# Altium PCB DATMACH.PcbDoc
Units mil, origin at the board's own origin, x right, y up, seen from the top; angles counter-clockwise.
Board outline 2830 x 3865 mil, 2 copper layers (Top Layer, Bottom Layer); 86 components, 58 nets, 272 pads, 0 vias.
Unrouted connection lines stored in the file: 11.
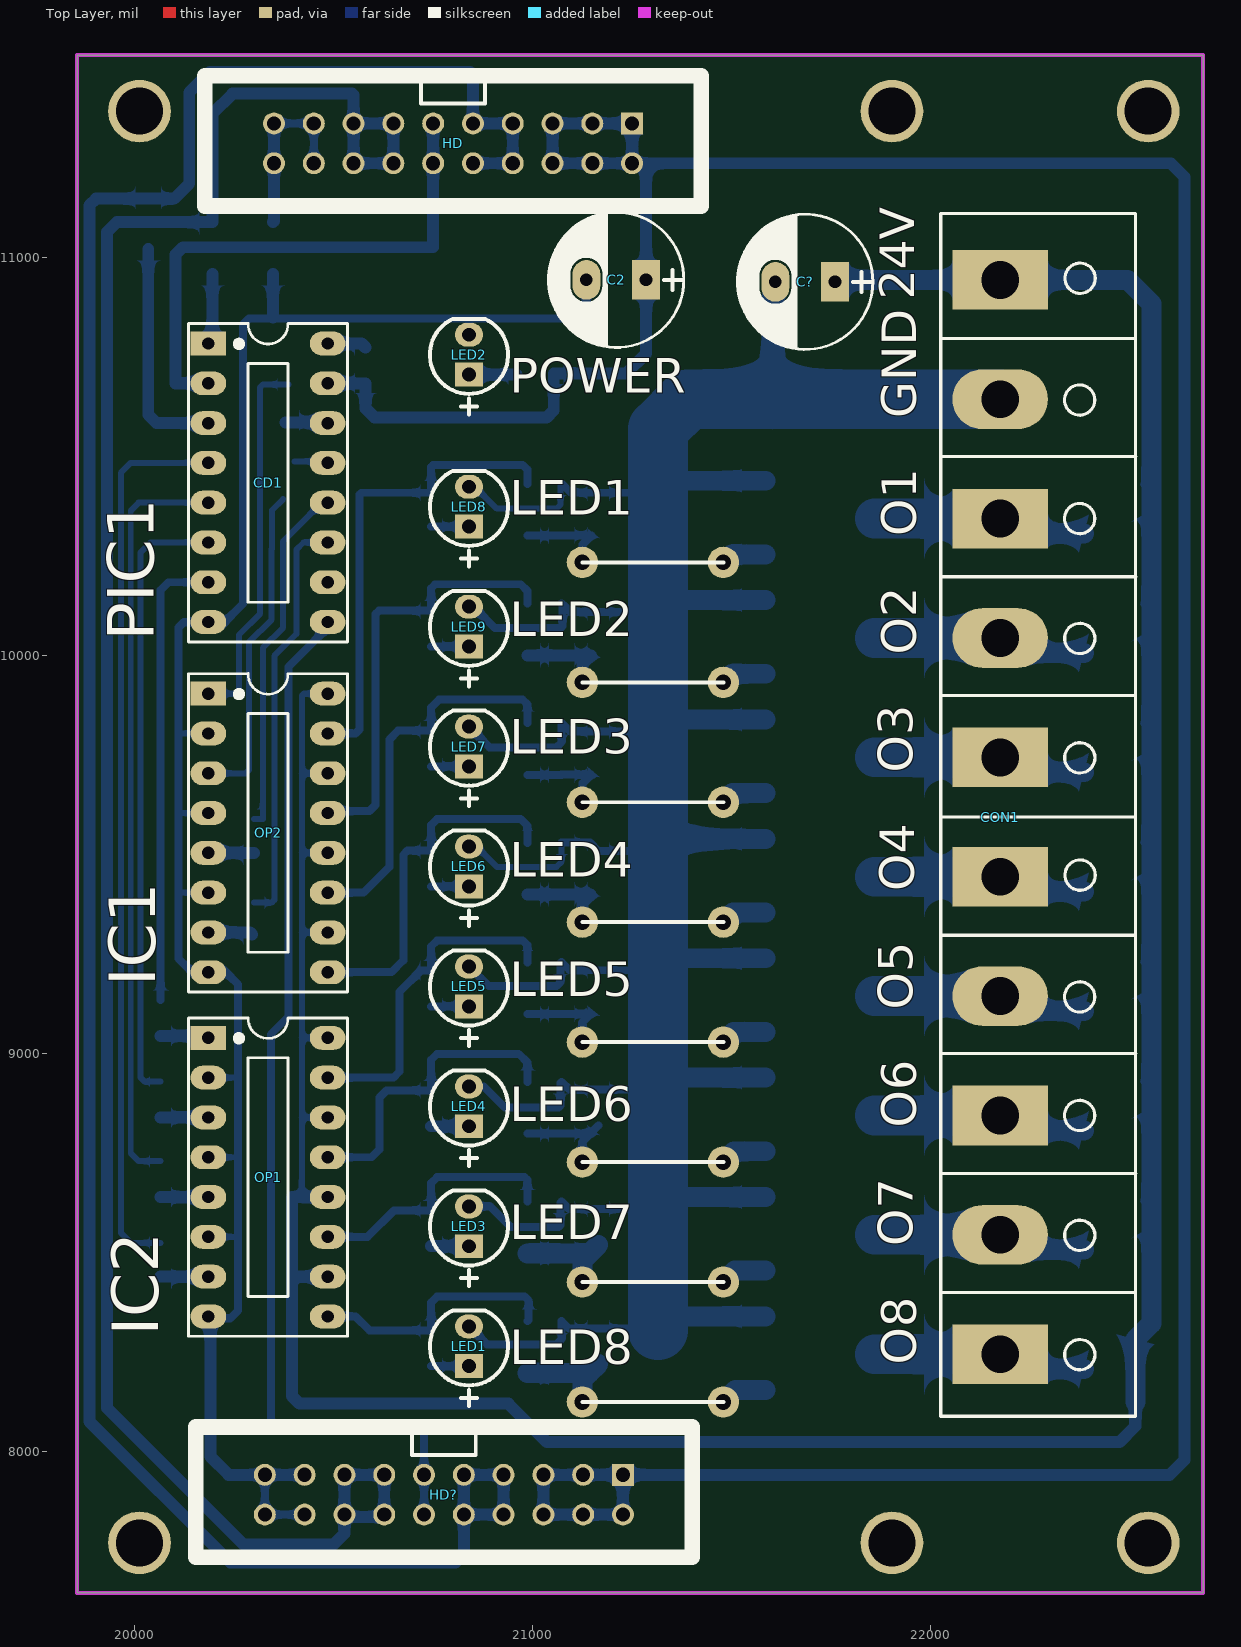
[diagram p0: Top Layer view]
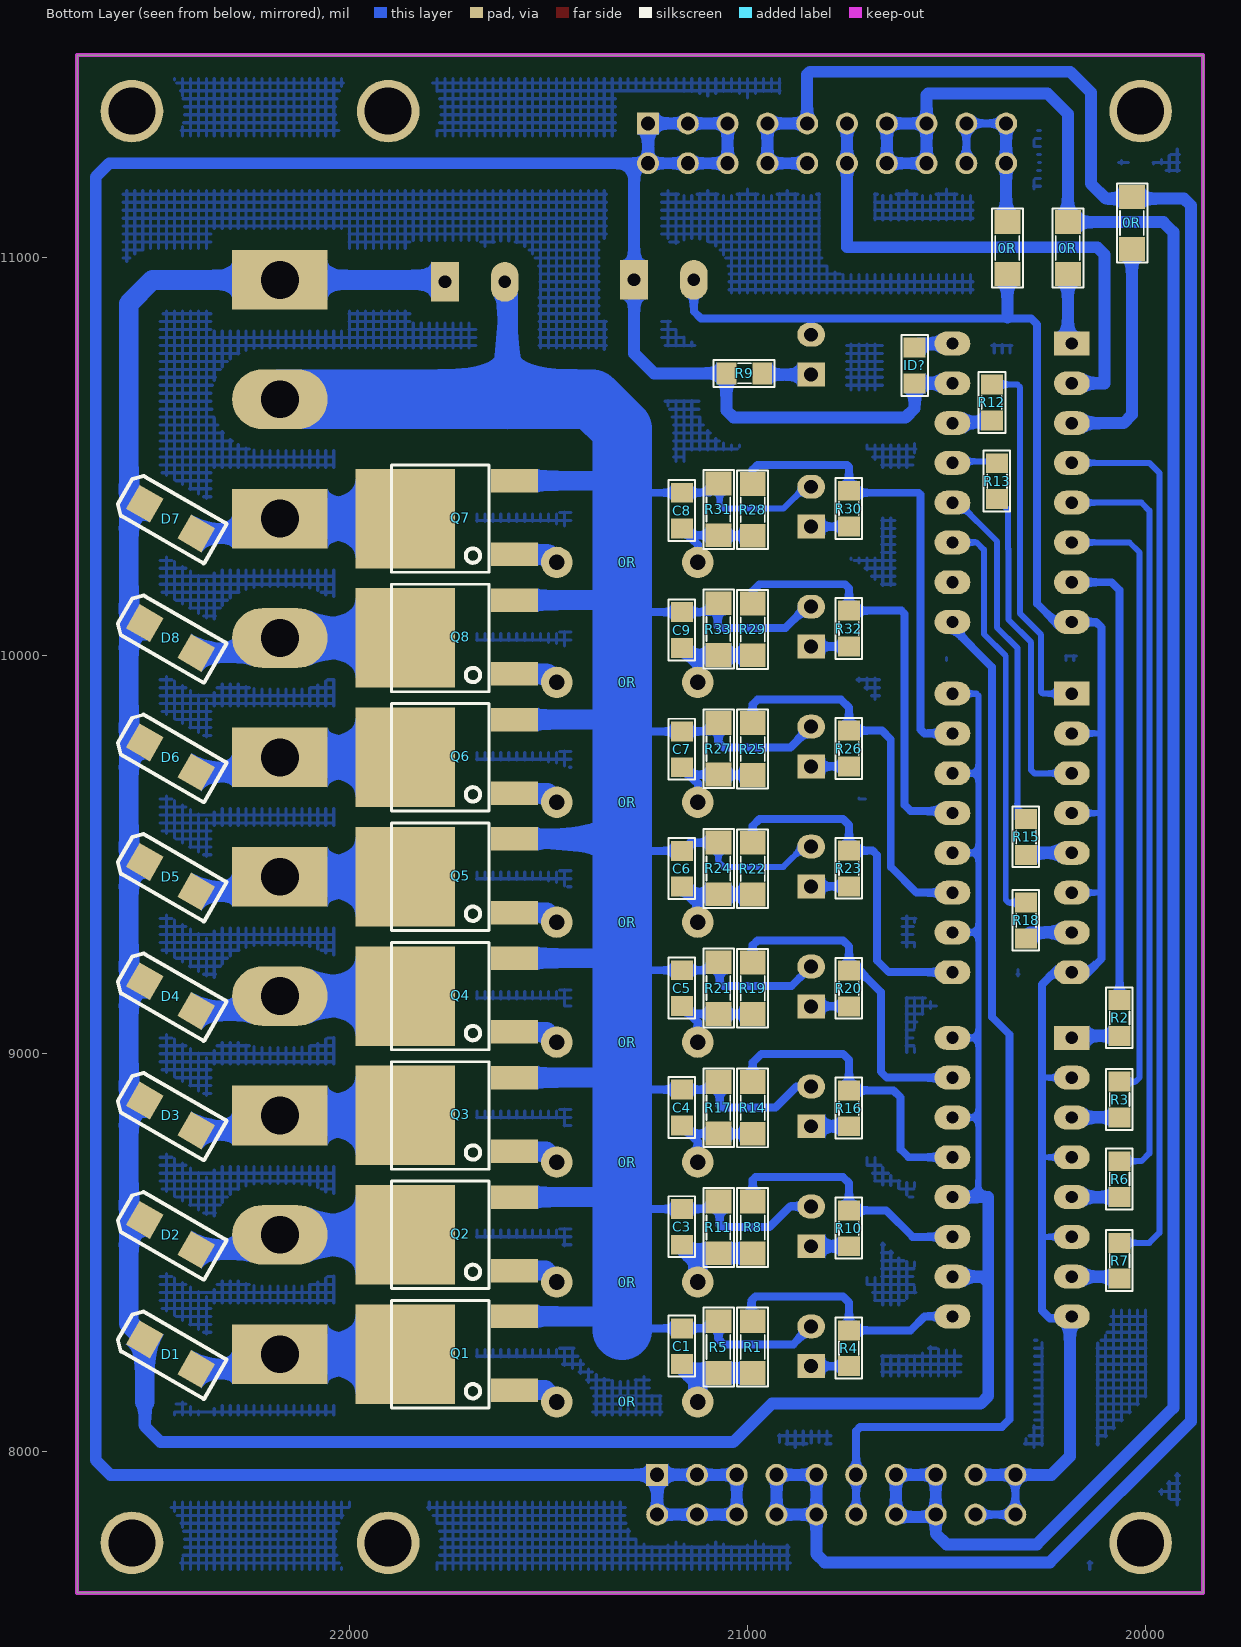
[diagram p1: Bottom Layer view, seen from below]
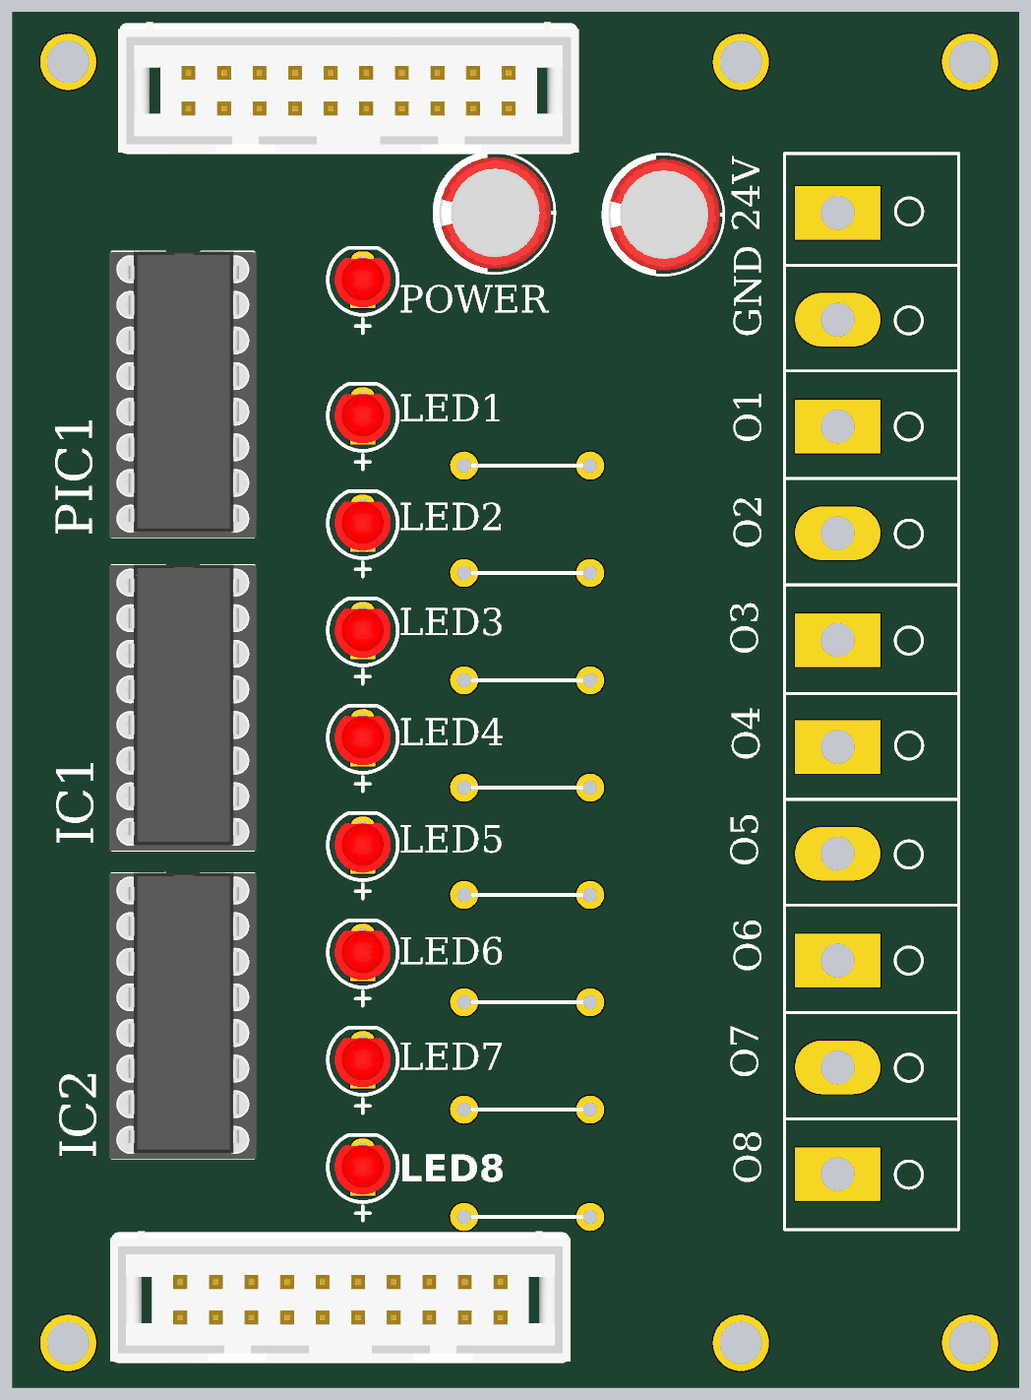
[diagram p2: 3D render of the assembled board from above, using the file's embedded part models]
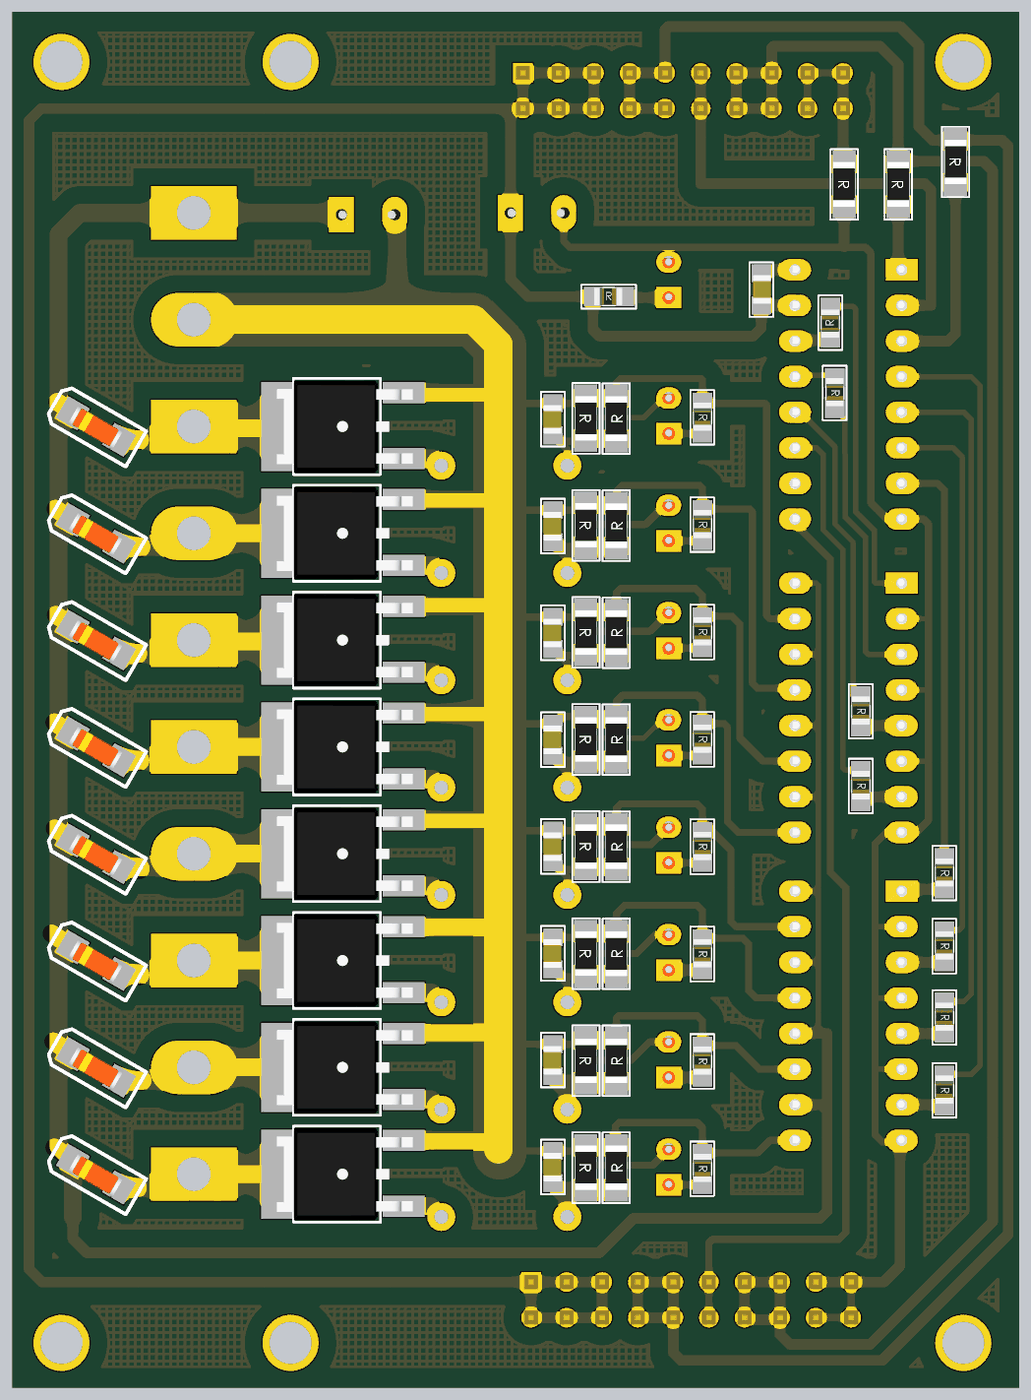
[diagram p3: 3D render of the assembled board from below, using the file's embedded part models]

## Layer stack, top to bottom
Top Solder: solder mask 0.4, Solder Resist, Dk 3.5
Top Layer: signal copper 1.4
Dielectric 1: dielectric 12.6, FR-4, Dk 4.8
Bottom Layer: signal copper 1.4
Bottom Solder: solder mask 0.4, Solder Resist, Dk 3.5

## Board outline
19855,7645 19855,11510 22685,11510 22685,7645

## Design rules (kind name [scope] priority, off if disabled: settings)
Clearance [All] p1: gap=10 except(50: Arc-Poly Track-Poly SMDPad-Poly THPad-Poly Via-Poly Fill-Poly Poly-Poly)
PolygonConnect [All] p1: connectstyle=Relief reliefconductorwidth=10 reliefentries=4 polygonreliefangle="90 Angle" airgapwidth=10
RoomDefinition CongSuat_SCH [InComponentClass('CongSuat_SCH')] p1: confinementstyle=ConfineIn formatcopy=TRUE lockcomponents=FALSE outline 3805,1580 24060,1580 24060,4625 3805,4625
RoutingVias [All] p1: holewidth=28 width=50 viastyle="Through Hole" minholewidth=28 minwidth=50 maxholewidth=28 maxwidth=50
SolderMaskExpansion [All] p1: expansion=4
Width [All] p1: maxlimit=150 minlimit=10 preferedwidth=10
30 further rules are at their usual default settings.

## Classes and differential pairs
component class CongSuat_SCH: C1 C2 C3 C4 C5 C6 C7 C8 C9 C? CD1 CON1 D1 D2 D3 D4 D5 D6 D7 D8 HD HD? ID? LED1 LED2 LED3 LED4 LED5 LED6 LED7 LED8 LED9 OP1 OP2 Q1 Q2 Q3 Q4 Q5 Q6 Q7 Q8 R1 R2 R3 R4 R5 R6 R7 R8 R9 R10 R11 R12 R13 R14 R15 R16 R17 R18 R19 R20 R21 R22 R23 R24 R25 R26 R27 R28 R29 R30 R31 R32 R33

## Components (designator, comment, footprint, x,y, rotation, side; value= is the part's Value field where it differs from the comment)
0R "Comment" GIM 21125,10235 r0 bottom
0R "Comment" GIM 21125,9933.57 r0 bottom
0R "Comment" GIM 21125,9632.14 r0 bottom
0R "Comment" GIM 21125,9330.71 r0 bottom
0R "Comment" GIM 21125,9029.29 r0 bottom
0R "Comment" GIM 21125,8727.86 r0 bottom
0R "Comment" GIM 21125,8426.43 r0 bottom
0R "Comment" GIM 21125,8125 r0 bottom
0R "Comment" TRO_SMD_1206 20344,11027 r270 bottom
0R "Comment" TRO_SMD_1206 20192,11027 r270 bottom
0R "Comment" TRO_SMD_1206 20031,11090 r270 bottom
C1 "104" TU_SMD_0805 21165,8265 r270 bottom
C2 "680_uF" "TU_HOA(100uF/35V - 470uF/16V)" 21210,10945 r180 top
C3 "104" TU_SMD_0805 21165,8565 r270 bottom
C4 "104" TU_SMD_0805 21165,8865 r270 bottom
C5 "104" TU_SMD_0805 21165,9165 r270 bottom
C6 "104" TU_SMD_0805 21165,9465 r270 bottom
C7 "104" TU_SMD_0805 21165,9765 r270 bottom
C8 "104" TU_SMD_0805 21165,10365 r270 bottom
C9 "104" TU_SMD_0805 21165,10065 r270 bottom
C? "100uF/16V" "TU_HOA(100uF/35V - 470uF/16V)" 21685,10940 r180 top
CD1 "PIC" DIP16 20335,10435 r270 top
CON1 "CON 10 KF762_MH" "CON 10 KF762" 22175,9595 r90 top locked
D1 "SS34" SOD80 22450,8245 r210 bottom
D2 "SS34" SOD80 22450,8545 r210 bottom
D3 "SS34" SOD80 22450,8845 r210 bottom
D4 "SS34" SOD80 22450,9145 r210 bottom
D5 "SS34" SOD80 22450,9445 r210 bottom
D6 "SS34" SOD80 22450,9745 r210 bottom
D7 "SS34" SOD80 22450,10345 r210 bottom
D8 "SS34" SOD80 22450,10045 r210 bottom
HD "IDE 20" "CABLE 20" 21250,11338 r180 top
HD? "IDE 20" "CABLE 20" 21227.01,7942 r180 top
ID? "Inductor 0805_MH" TU_SMD_0805 20580,10730 r90 bottom
LED1 "LED3" "LED 3mm Do" 20840,8265 r90 top
LED2 "LED3" "LED 3mm Do" 20840,10757 r90 top
LED3 "LED3" "LED 3mm Do" 20840,8566.43 r90 top
LED4 "LED3" "LED 3mm Do" 20840,8867.86 r90 top
LED5 "LED3" "LED 3mm Do" 20840,9169.29 r90 top
LED6 "LED3" "LED 3mm Do" 20840,9470.71 r90 top
LED7 "LED3" "LED 3mm Do" 20840,9772.14 r90 top
LED8 "LED3" "LED 3mm Do" 20840,10375 r90 top
LED9 "LED3" "LED 3mm Do" 20840,10073.57 r90 top
OP1 "IC2" DIP16 20335,8690 r270 top
OP2 "IC1" DIP16 20335,9555 r270 top
Q1 "FDD 8870" TO-252 21645,8115 r90 bottom
Q2 "FET" TO-252 21645,8415 r90 bottom
Q3 "FDD 8870" TO-252 21645,8715 r90 bottom
Q4 "FET" TO-252 21645,9015 r90 bottom
Q5 "FED" TO-252 21645,9315 r90 bottom
Q6 "FET" TO-252 21645,9615 r90 bottom
Q7 "FET" TO-252 21645,10215 r90 bottom
Q8 "FET" TO-252 21645,9915 r90 bottom
R1 "10K" TRO_SMD_1206 20990,8261 r90 bottom
R2 "330" "Tro SMD 0805" 20065,9090 r270 bottom
R3 "330" "Tro SMD 0805" 20065,8885 r270 bottom
R4 "4K7" "Tro SMD 0805" 20745,8260 r270 bottom
R5 "10K" TRO_SMD_1206 21070,8265 r270 bottom
R6 "330" "Tro SMD 0805" 20065,8685 r270 bottom
R7 "330" "Tro SMD 0805" 20065,8480 r270 bottom
R8 "10K" TRO_SMD_1206 20990,8561.57 r90 bottom
R9 "1K" "Tro SMD 0805" 21008,10710 r180 bottom
R10 "4K7" "Tro SMD 0805" 20745,8561.43 r270 bottom
R11 "10K" TRO_SMD_1206 21070,8565.71 r270 bottom
R12 "330" "Tro SMD 0805" 20386,10637 r90 bottom
R13 "330" "Tro SMD 0805" 20373,10439 r270 bottom
R14 "10K" TRO_SMD_1206 20990,8862.14 r90 bottom
R15 "330" "Tro SMD 0805" 20300,9545 r270 bottom
R16 "4K7" "Tro SMD 0805" 20745,8862.86 r270 bottom
R17 "10K" TRO_SMD_1206 21070,8866.43 r270 bottom
R18 "330" "Tro SMD 0805" 20300,9335 r270 bottom
R19 "10K" TRO_SMD_1206 20990,9162.71 r90 bottom
R20 "4K7" "Tro SMD 0805" 20745,9164.29 r270 bottom
R21 "10K" TRO_SMD_1206 21070,9167.14 r270 bottom
R22 "10K" TRO_SMD_1206 20990,9463.29 r90 bottom
R23 "4K7" "Tro SMD 0805" 20745,9465.71 r270 bottom
R24 "10K" TRO_SMD_1206 21070,9467.86 r270 bottom
R25 "10K" TRO_SMD_1206 20990,9763.86 r90 bottom
R26 "4K7" "Tro SMD 0805" 20745,9767.14 r270 bottom
R27 "10K" TRO_SMD_1206 21070,9768.57 r270 bottom
R28 "10K" TRO_SMD_1206 20990,10365 r90 bottom
R29 "10K" TRO_SMD_1206 20990,10064.43 r90 bottom
R30 "4K7" "Tro SMD 0805" 20745,10370 r270 bottom
R31 "10K" TRO_SMD_1206 21070,10370 r270 bottom
R32 "4K7" "Tro SMD 0805" 20745,10068.57 r270 bottom
R33 "10K" TRO_SMD_1206 21070,10069.29 r270 bottom

## Footprints (in the part's own frame and the unit in brackets; to place one, negate y for a bottom-side part, rotate by r counter-clockwise, add the part's x,y. Pads: shape width x height; smd on the part's side, far side on the other; paste and mask are expansions set on the pad)
"CABLE 20" [mm] "Connector; Header; 5x2 Position"
  rect 1.4x1.4 hole 0.9: 1(0,0)
  round 1.4 hole 0.9: 2(0,2.54) 3(2.54,0) 4(2.54,2.54) 5(5.08,0) 6(5.08,2.54) 7(7.62,0) 8(7.62,2.54) 9(10.16,0) 10(10.16,2.54) 11(12.7,0) 12(12.7,2.54) 13(15.24,0) 14(15.24,2.54) 15(17.78,0) 16(17.78,2.54) 17(20.32,0) 18(20.32,2.54) 19(22.86,0) 20(22.86,2.54)
  silkscreen extent -4.42,-3.05 27.28,5.27, body extent -5.02,-3.63 27.88,5.77, height 9.3
"CON 10 KF762" [mil]
  rect 150x240 hole 95: 1(-1350,0) 3(-750,0) 5(-150,0) 6(150,0) 8(750,0) 10(1350,0)
  oval 150x240 hole 95: 2(-1050,0) 4(-450,0) 7(450,0) 9(1050,0)
  silkscreen extent -1506,-341 1517,149
DIP16 [mil] "16 PIN, W 300mil, Pin to pin 100mil"
  rect 60x90 hole 31: 1(-350,-150)
  oval 60x90 hole 31: 2(-250,-150) 3(-150,-150) 4(-50,-150) 5(50,-150) 6(150,-150) 7(250,-150) 8(350,-150) 9(350,150) 10(250,150) 11(150,150) 12(50,150) 13(-50,150) 14(-150,150) 15(-250,150) 16(-350,150)
  silkscreen extent -400,-200 400,200, body extent -402,-207 402,206, height 299
GIM [mm]
  round 2 hole 1: 1(0,0) 1(9,0)
"LED 3mm Do" [mil] "Footprintf LED phi 3"
  rect 60x70 hole 35: 1(-50,0)
  oval 60x70 hole 35: 2(50,0)
  silkscreen extent -150,-98 90,98, body extent -78,-79 60,79, height 205
SOD80 [mil]
  rect 70x70 smd: 1(74.8,0) 2(-74.8,0)
  silkscreen extent -133,-56 129,59, body extent -73,-34 73,29, height 63
TO-252 [mil] "TO-252"
  rect 59.06x118.11 smd: 1(40,-60) 3(225,-60)
  rect 250x250 smd: 2(130,215)
  silkscreen extent -5,5 265,250, body extent 0,-85 260,296, height 91
"Tro SMD 0805" [mil]
  rect 50x55 smd: 1(-45,0) 2(45,0)
  silkscreen extent -77,-34 76,33, body extent -62,-28 56,27, height 21
TRO_SMD_1206 [mil]
  rect 60x65 smd: 1(-63,-3) 2(67,-3)
  silkscreen extent -97,-41 101,36, body extent -81,-38 85,33, height 25
"TU_HOA(100uF/35V - 470uF/16V)" [mil]
  rect 70x100 hole 32: 1(-75,0)
  oval 70x100 hole 32: 2(75,0)
  silkscreen extent -170,-170 170,170, body extent -160,-157 155,157, height 446
TU_SMD_0805 [mil]
  rect 50x55 smd: 1(-45,0) 2(45,0)
  silkscreen extent -77,-34 76,33, body extent -40,-27 40,23, height 24

## Part data
C1 C3 C4 C5 C6 C7 C8 C9: library part TU_SMD_0805_MH
C2: library part TU_HOA_680_uF_25V_MH, "TU_HOA_680_uF_25V"
C?: library part TU_HOA_100uF_50V_MH, "TU_HOA_100uF_50V"
CD1: library part CD4094
CON1: "CON 10 KF762 - 10P 7.62mm"
D1 D2 D3 D4 D5 D6 D7 D8: library part "Diode 1N4148 SOD80 450mA 100V ( LL34 1N4148 SMD)_MH", "Diode 1N4148 SOD80 450mA 100V ( LL34 1N4148 SMD)"
HD HD?: "IDE header 20P"
ID?: "cuon cam 0805"
LED1 LED2 LED3 LED4 LED5 LED6 LED7 LED8 LED9: library part "LED 3mm_MH", "LED 3mm"
OP1 OP2: library part "TLP521-4GB DIP16 _MH", "TLP521-4GB DIP16 _MH"
Q2 Q4 Q5 Q6 Q7 Q8: library part "FDD 8870"
R1 R5 R8 R11 R14 R17 R19 R21 R22 R24 R25 R27 R28 R29 R31 R33: library part TRO_SMD_1206_MH
R2 R3 R4 R6 R7 R9 R10 R12 R13 R15 R16 R18 R20 R23 R26 R30 R32: library part TRO_SMD_0805_MH, "TRO_SMD_0805"

## Free pads (board coordinates)
  round 157.48 hole 118.11: 2(20012,7771) 3(21903,7771) 4(21903,11369) 5(20012,11369) 6(22547,11369) 7(22547,7771)

## Nets (pads, with @x,y where several pads share a name; then routed paths per layer and width w, separated by ;. In a path a pad name is that pad's centre, name@x,y a point inside that pad or via, vN(x,y) a via of type N, cw(c..) or ccw(c..) an arc to the next point about the centre after c; other vN are vias at no path point)
5V: C2.1 CD1.15 HD.1 HD.2 HD.3 HD.4 HD.5 HD.6 HD?.1 HD?.2 HD?.3 HD?.4 HD?.5 HD?.6 ID?.1 R9.1 | length 8757.3
  Bottom Layer w30: CD1.15 ID?.1 20580,10622 20603,10599 21035,10599 21053,10617 R9.1 21235,10710 21285,10760 C2.1 21285,11238 HD.2 ; HD?.5@21030,7947 21027.01,7944.01 HD?.5 ; HD.2@21250,11247 HD.1 HD.3 HD.5 HD.6 HD.4 HD.2 ; HD?.5 HD?.6 HD?.4 HD?.2 HD?.1 ; HD?.5 HD?.3 HD?.1 ; HD?.1 22601,7942 22638,7979 22638,11204 22604,11238 HD.2
24V: C?.1 CON1.10 D1.2 D2.2 D3.2 D4.2 D5.2 D6.2 D7.2 D8.2 OP1.10 OP1.12 OP1.14 OP1.16 OP2.10 OP2.12 OP2.14 OP2.16 | length 8185.2
  Bottom Layer w15: 20420,8640 20420,8840 ; OP1.14 20420,8840 ; OP1.16 20420,9040 ; OP2.10 20420,9305 ; OP2.12 20420,9505 ; OP2.14 20420,9705 ; OP2.16 20425,9905 20420,9900 20420,9705 ; 20420,8840 20420,9040 ; 20420,9040 20420,9305 ; 20420,9305 20420,9505 ; 20420,9505 20420,9705
  Bottom Layer w30: OP1.10 20410,8440 20395,8425 ; OP1.12 20420,8640 20395,8640 20395,8425 ; 22514.78,8125 22514.78,8064 22474.78,8024 21036,8024 20939,8121 20414,8121 20395,8140 20395,8425
  Bottom Layer w50: C?.1 21760,10945 CON1.10 22495,10945 22555,10885 22555,8322.62 D1.2 22514.78,8125
CD_CLK: 0R.1@20034,11153 0R.2@20034,11023 CD1.3 HD.7 HD.8 HD.9 HD.10 HD?.7 HD?.8 HD?.9 HD?.10 | length 6891.3
  Bottom Layer w30: 0R.2@20034,11023 20034,10606 20055,10585 CD1.3 ; HD.10 HD.8 HD.7 HD.9 20850,11461 20843,11468 20189,11468 20137,11416 20137,11187 20099,11149 19903,11149 19886,11132 19886,8076 20240,7722 20806,7722 20827.01,7743.01 HD?.10 ; HD?.10 HD?.9 HD?.7 HD?.8 HD?.10
CD_DATA: CD1.2 HD.11 HD.12 | length 1371.5
  Bottom Layer w30: CD1.2 20103,10685 20103,11009 20121,11027 20750,11027 HD.12 HD.11
CD_O1: CD1.4 R7.1 | length 2250.7
  Bottom Layer w15: R7.1 19990,8525 19965,8550 19965,10460 19990,10485 CD1.4
CD_O2: CD1.5 R6.1 | length 1901.6
  Bottom Layer w15: R6.1 20010,8730 19990,8750 19990,10365 20010,10385 CD1.5
CD_O3: CD1.6 R3.1 | length 1554.5
  Bottom Layer w15: R3.1 20025,8930 20015,8940 20015,10260 20040,10285 CD1.6
CD_O4: CD1.7 R2.1 | length 1158.3
  Bottom Layer w20: R2.1 20065,10165 20085,10185 CD1.7
CD_O5: CD1.14 R12.1 | length 106.8
  Bottom Layer w30: R12.1@20379,10587 20483,10587 CD1.14
CD_O6: CD1.13 R13.1 | length 84.7
  Bottom Layer w15: 20402,10489 20481,10489 CD1.13
CD_O7: CD1.12 R15.1 | length 893.3
  Bottom Layer w15: R15.1 20322,9590 20322,10020 20373,10071 20373,10288 20470,10385 CD1.12
CD_O8: CD1.11 R18.1 | length 1043.1
  Bottom Layer w15: R18.1 20344,9380 20351,9387 20351,10000 20406,10055 20406,10267 20424,10285 CD1.11
CD_OUT_DATA: CD1.9 HD?.11 HD?.12 | length 2670.2
  Bottom Layer w20: CD1.9 20485,10071 20386,9972 20386,9093 20342,9049 20342,8081 20361,8062 20717,8062 20727.01,8051.99 HD?.11 HD?.12
CD_STB: 0R.1@20195,11090 0R.2@20195,10960 CD1.1 HD.13 HD.14 HD.15 HD.16 HD?.13 HD?.14 HD?.15 HD?.16 | length 5750
  Bottom Layer w30: CD1.1 20185,10803 20195,10813 0R.2@20195,10960 ; HD?.14 HD?.13 HD?.15 HD?.16 ; HD?.14@20637,7836 20533.01,7836 HD?.16 ; HD.13@20650,11347 HD.13 ; HD?.16 20527.01,7794.01 20500,7767 20273,7767 19930,8110 19930,11065 19955,11090 20195,11090 20195,11362 20246,11413 20546,11413 20550,11409 HD.15 ; HD.15 HD.16 HD.14 HD.13 ; HD.15 HD.13
GND: 0R.1@20347,11090 0R.2@20347,10960 C2.2 CD1.8 HD.17 HD.18 HD.19 HD.20 HD?.17 HD?.18 HD?.19 HD?.20 LED2.2 OP1.2 OP1.4 OP1.6 OP1.8 OP2.2 OP2.4 OP2.6 OP2.8 | length 5611.7
  Bottom Layer w15: 20110,9405 OP2.6 ; 20110,9605 OP2.4 ; 20110,9805 OP2.2 ; OP1.6 20260,8540 ; OP1.4 20260,8740 ; OP1.2 20260,8940
  Bottom Layer w20: OP1.8 20190,8335 20240,8335 20260,8355 20260,8540 20260,8740 20260,8940 20260,9174 20229,9205 OP2.8 20144,9205 20110,9239 20110,9405 20110,9605 20110,9805 20110,10071 20124,10085 CD1.8 20226,10085 20272,10131 20272,10833 20287,10848 20845,10848 ; HD?.19 HD?.20 HD?.18@20422,7842 ; HD.19 HD.17 ; HD.18 HD.17@20450,11333 ; LED2.2 20840,10843 20845,10848 ; C2.2@21121,10959 C2.2@21127,10965 ; C2.2 21135,10866 21117,10848 20845,10848
  Bottom Layer w30: OP1.8@20190,8335 20190,7988 20236,7942 HD?.19 HD?.17 ; 20347,10850 0R.2@20347,10960 ; 0R.1@20347,11090 20350,11093 HD.20 HD.19
GND_FDD: C1.1 C3.1 C4.1 C5.1 C6.1 C7.1 C8.1 C9.1 C?.2 CON1.9 LED1.2 LED3.2 LED4.2 LED5.2 LED6.2 LED7.2 LED8.2 LED9.2 Q1.3 Q2.3 Q3.3 Q4.3 Q5.3 Q6.3 Q7.3 Q8.3 R5.1 R11.1 R17.1 R21.1 R24.1 R27.1 R31.1 R33.1 | length 10245.5
  Bottom Layer w15: LED6.2 20859.29,9520.71 20910,9470 21060,9470 21073,9483 R24.1 ; LED8.2 20855,10425 20910,10370 21060,10370 21070,10380 21070,10430 R31.1
  Bottom Layer w20: LED1.2 20885,8270 21060,8270 21073,8283 R5.1 21091,8310 C1.1 21310,8310 21315,8305 ; LED3.2 20893.57,8616.43 20945,8565 21065,8565 21070,8570 21070,8625.71 R11.1 21091.71,8610 C3.1 21280,8610 21315,8645 ; LED4.2 20877.14,8917.86 20930,8865 21065,8865 21070,8870 21070,8926.43 R17.1 21092.43,8910 C4.1 21275,8910 21315,8950 ; LED5.2 20869.29,9190 20870,9190 20890,9170 21060,9170 21070,9180 21070,9227.14 R21.1 21093.14,9210 C5.1 21280,9210 21315,9245 ; LED7.2 20892.14,9770 21060,9770 21073,9783 R27.1 21094.57,9810 C7.1 21275,9810 21315,9850 ; LED9.2 20851.43,10123.57 20905,10070 21070,10070 21075,10075 21075,10120 R33.1@21080.14,10125.14 ; R24.1 21144.14,9530.86 C6.1 21285,9510 21315,9540 ; R33.1 R33.1@21080.14,10125.14 ; R31.1 21096,10410 C8.1 21275,10410 21315,10450 ; 21315,10155 21270,10110 C9.1 21095.29,10110 R33.1@21080.14,10125.14
  Bottom Layer w50: 21315,8305 21350,8340 Q1.3 ; 21315,8645 21320,8640 Q2.3 ; 21315,8950 21325,8940 Q3.3 ; 21315,9245 21320,9240 Q4.3 ; 21315,9540 Q5.3 ; 21315,9850 21325,9840 Q6.3 ; 21315,10155 21330,10140 Q8.3 ; 21315,10450 21325,10440 Q7.3 ; 21603,10645 21603,10940 C?.2
  Bottom Layer w150: 21315,8305 21315,8645 21315,8950 21315,9245 21315,9540 21315,9850 21315,10155 21315,10450 21315,10570 21390,10645 21603,10645 CON1.9
NetC1_2: 0R.1@21125,8125 0R.1@21479.33,8125 C1.2 Q1.1 R1.1 R5.2 | length 385.7
  Bottom Layer w50: R1.1 R5.2 C1.2@21143,8198 ; 0R.1@21125,8125 21125,8180 C1.2@21143,8198 ; C1.2 C1.2@21143,8198 ; 0R.1@21479.33,8125 21509.33,8155 Q1.1
NetC3_2: 0R.1@21125,8426.43 0R.1@21479.33,8426.43 C3.2 Q2.1 R8.1 R11.2 | length 384.2
  Bottom Layer w50: R8.1 C3.2@21143.57,8498.57 ; 0R.1@21125,8426.43 21125,8480 C3.2@21143.57,8498.57 ; C3.2 C3.2@21143.57,8498.57 ; 0R.1@21479.33,8426.43 21507.9,8455 Q2.1
NetC4_2: 0R.1@21125,8727.86 0R.1@21479.33,8727.86 C4.2 Q3.1 R14.1 R17.2 | length 383.2
  Bottom Layer w20: R14.1 21072.71,8799.14 R17.2 C4.2@21144.43,8799.43 ; 0R.1@21125,8727.86 21125,8780 C4.2@21144.43,8799.43 ; C4.2 C4.2@21144.43,8799.43
  Bottom Layer w50: 0R.1@21479.33,8727.86 21506.47,8755 Q3.1
NetC5_2: 0R.1@21125,9029.29 0R.1@21479.33,9029.29 C5.2 Q4.1 R19.1 R21.2 | length 353.8
  Bottom Layer w20: R19.1 21072.57,9099.71 R21.2 21145.14,9100.14 21125,9080 0R.1@21125,9029.29
  Bottom Layer w50: 0R.1@21479.33,9029.29 21505.05,9055 Q4.1
NetC6_2: 0R.1@21125,9330.71 0R.1@21479.33,9330.71 C6.2 Q5.1 R22.1 R24.2 | length 353.6
  Bottom Layer w30: R22.1 21072.43,9400.29 R24.2 21145.86,9400.86 21125,9380 0R.1@21125,9330.71
  Bottom Layer w50: 0R.1@21479.33,9330.71 21503.62,9355 Q5.1
NetC7_2: 0R.1@21125,9632.14 0R.1@21479.33,9632.14 C7.2 Q6.1 R25.1 R27.2 | length 353.4
  Bottom Layer w20: R25.1 21072.29,9700.86 R27.2 21146.57,9701.57 21125,9680 0R.1@21125,9632.14
  Bottom Layer w50: 0R.1@21479.33,9632.14 21502.19,9655 Q6.1
NetC8_2: 0R.1@21125,10235 0R.1@21479.33,10235 C8.2 Q7.1 R28.1 R31.2 | length 352.9
  Bottom Layer w20: R28.1 21072,10302 R31.2 21148,10303 21125,10280 0R.1@21125,10235
  Bottom Layer w50: 0R.1@21479.33,10235 21499.33,10255 Q7.1
NetC9_2: 0R.1@21125,9933.57 0R.1@21479.33,9933.57 C9.2 Q8.1 R29.1 R33.2 | length 350.7
  Bottom Layer w30: R29.1 21146.43,10001.43 21125,9980 0R.1@21125,9933.57
  Bottom Layer w50: 0R.1@21479.33,9933.57 21500.76,9955 Q8.1
NetCD1_16: CD1.16 ID?.2 | length 99.1
  Bottom Layer w30: CD1.16 20570,10785 ID?.2
NetLED1_1: LED1.1 R4.2 | length 95
  Bottom Layer w20: R4.2 LED1.1
NetLED2_1: LED2.1 R9.2 | length 120
  Bottom Layer w30: LED2.1 R9.2@20960,10707
NetLED3_1: LED3.1 R10.2 | length 95
  Bottom Layer w30: R10.2 LED3.1
NetLED4_1: LED4.1 R16.2 | length 95
  Bottom Layer w30: R16.2 LED4.1
NetLED5_1: LED5.1 R20.2 | length 95
  Bottom Layer w20: R20.2 LED5.1
NetLED6_1: LED6.1 R23.2 | length 95
  Bottom Layer w20: R23.2 LED6.1
NetLED7_1: LED7.1 R26.2 | length 95
  Bottom Layer w20: R26.2 LED7.1
NetLED8_1: LED8.1 R30.2 | length 95
  Bottom Layer w20: R30.2 LED8.1
NetLED9_1: LED9.1 R32.2 | length 95
  Bottom Layer w20: R32.2 LED9.1
NetOP1_1: OP1.1 R2.2 | length 122.1
  Bottom Layer w30: R2.2 20180,9045 OP1.1
NetOP1_3: OP1.3 R3.2 | length 120
  Bottom Layer w30: R3.2 OP1.3
NetOP1_5: OP1.5 R6.2 | length 120
  Bottom Layer w30: R6.2 OP1.5
NetOP1_7: OP1.7 R7.2 | length 120
  Bottom Layer w30: R7.2@20065,8440 OP1.7
NetOP2_1: OP2.1 R12.2 | length 940.5
  Bottom Layer w15: OP2.1 20258,9905 20262,9909 20262,10053 20315,10106 20315,10675 20322,10682 R12.2
NetOP2_3: OP2.3 R13.2 | length 821.9
  Bottom Layer w15: OP2.3 20279,9705 20287,9713 20287,10034 20344,10091 20344,10268 20345,10269 20345,10366 R13.2
NetOP2_5: OP2.5 R15.2 | length 115
  Bottom Layer w30: OP2.5 R15.2@20300,9505
NetOP2_7: OP2.7 R18.2 | length 112.1
  Bottom Layer w30: OP2.7 20290,9305 R18.2@20295,9300
OUT1: CON1.1 D1.1 Q1.2 | length 540.7
  Bottom Layer w50: CON1.1 22212.4,8207.6 D1.1
  Bottom Layer w100: Q1.2 CON1.1
OUT2: CON1.2 D2.1 Q2.2 | length 540.7
  Bottom Layer w50: CON1.2 22212.4,8507.6 D2.1
  Bottom Layer w100: Q2.2 CON1.2
OUT3: CON1.3 D3.1 Q3.2 | length 540.7
  Bottom Layer w50: CON1.3 22212.4,8807.6 D3.1
  Bottom Layer w100: Q3.2 CON1.3
OUT4: CON1.4 D4.1 Q4.2 | length 540.7
  Bottom Layer w50: CON1.4 22212.4,9107.6 D4.1
  Bottom Layer w100: Q4.2 CON1.4
OUT5: CON1.5 D5.1 Q5.2 | length 540.7
  Bottom Layer w50: CON1.5 22212.4,9407.6 D5.1
  Bottom Layer w100: Q5.2 CON1.5
OUT6: CON1.6 D6.1 Q6.2 | length 540.7
  Bottom Layer w50: CON1.6 22212.4,9707.6 D6.1
  Bottom Layer w100: Q6.2 CON1.6
OUT7: CON1.7 D8.1 Q8.2 | length 540.7
  Bottom Layer w50: CON1.7 22212.4,10007.6 D8.1
  Bottom Layer w100: Q8.2 CON1.7
OUT8: CON1.8 D7.1 Q7.2 | length 540.7
  Bottom Layer w50: CON1.8 22212.4,10307.6 D7.1
  Bottom Layer w100: Q7.2 CON1.8
OUT_OT1: OP1.9 R1.2 R4.1 | length 653.1
  Bottom Layer w20: OP1.9 20555,8340 20590,8305 R4.1 20745,8375 20760,8390 20980,8390 20990,8380 20990,8331 R1.2
OUT_OT2: OP1.11 R8.2 R10.1 | length 661.6
  Bottom Layer w20: OP1.11 20585,8540 20651.43,8606.43 R10.1 20745,8675 20760,8690 20980,8690 20987,8683 R8.2
OUT_OT3: OP1.13 R14.2 R16.1 | length 789
  Bottom Layer w20: OP1.13 20595,8740 20615,8760 20615,8890 20632.86,8907.86 R16.1 20745,8985 20760,9000 20965,9000 20987,8978 R14.2
OUT_OT4: OP1.15 R19.2 R20.1 | length 845.9
  Bottom Layer w20: OP1.15 20650,8940 20665,8955 20665,9155 20719.29,9209.29 R20.1 20745,9270 20760,9285 20975,9285 20987,9273 R19.2
OUT_OT5: OP2.9 R22.2 R23.1 | length 904.1
  Bottom Layer w20: OP2.9 20645,9205 20675,9235 20675,9500 20685.71,9510.71 R23.1 20745,9575 20760,9590 20970,9590 20987,9573 R22.2
OUT_OT6: OP2.11 R25.2 R26.1 | length 976.4
  Bottom Layer w20: OP2.11 20575,9405 20640,9470 20640,9790 20662.14,9812.14 R26.1 20745,9870 20765,9890 20975,9890 20987,9878 R25.2
OUT_OT7: OP2.13 R29.2 R32.1 | length 1093
  Bottom Layer w20: OP2.13 20490,9610 20590,9610 20605,9625 20605,10105 20613.57,10113.57 R32.1 20745,10170 20755,10180 20970,10180 20987,10163 R29.2
OUT_OT8: OP2.15 R28.2 R30.1 | length 1203.3
  Bottom Layer w20: OP2.15 20555,9805 20565,9815 20565,10405 20570,10410 20740,10410 R30.1 20745,10475 20750,10480 20975,10480 20987,10468 R28.2
pads on no net: CD1.10

## Polygon pours and split planes (outlines as drawn)
no net on Bottom Layer "Keep-Out Layer-No Net" (hatched 90Degree grid 20 track 8, pour order 6): 19855,11510 19855,7645 22685,7645 22685,11510

## Keep-outs
Keep-Out Layer:
  the board outline again, w10

## Silkscreen, mask and mechanical layers (free items; w line width, h text height)
Top Overlay:
  text "24V" at 21987.95,10895 h150 r90
  text "POWER" at 20943,10632 h150
  text "GND" at 21992.64,10597.8 h150 r90
  text "LED1" at 20943,10325.87 h150
  text "O1" at 21992.64,10300.45 h150 r90
  text "PIC1" at 20087,10038 h200 r90
  text "LED2" at 20943,10020.76 h150
  text "O2" at 21992.64,10003.1 h150 r90
  text "LED3" at 20943,9725.61 h150
  text "O3" at 21983.71,9705.75 h150 r90
  text "LED4" at 20943,9416.26 h150
  text "O4" at 21987.95,9408.4 h150 r90
  text "IC1" at 20090,9170 h200 r90
  text "LED5" at 20943,9115.4 h150
  text "O5" at 21983.71,9111.05 h150 r90
  text "O6" at 21992.64,8813.7 h150 r90
  text "LED6" at 20943,8801.21 h150
  text "O7" at 21984,8516.35 h150 r90
  text "LED7" at 20943,8504.89 h150
  text "IC2" at 20098,8291 h200 r90
  text "O8" at 21992.64,8219 h150 r90
  text "LED8" at 20943,8191 h150
Bottom Solder:
  lines w40: 21306,9538 21581,9538 ; 21310,9238 21582,9238 ; 21311,10137 21581,10137 ; 21315,9843 21586,9843 ; 21324,10434 21582,10434
  lines w50: 21310,8643 21583,8643 ; 21311,8938 21582,8938 ; 21319,8335 21592,8335 ; 21880,10045 22175,10045 ; 21895,9445 22175,9445 ; 21898,8545 22175,8545 ; 21906,8845 22175,8845 ; 21910,8245 22175,8245 ; 21912,9741 22189,9741 ; 21917,9145 22175,9145 ; 21930,10340 22091,10340 ; 22509,10381 22559,10414 ; 22513,9783 22563,9816 ; 22514,10081 22564,10114 ; 22516,9183 22566,9216 ; 22517,8287 22567,8320 ; 22517,9481 22567,9514 ; 22520,8585 22570,8618 ; 22525,8888 22575,8921
  lines w60: 22324,8508 22374,8510 ; 22327,10007 22377,10009 ; 22329,9103 22379,9105 ; 22330,8805 22380,8807 ; 22330,9407 22380,9409 ; 22331,10308 22381,10310 ; 22336,9707 22386,9709 ; 22337,8207 22387,8209
  lines w80: 21319,8315 21319,10576 21388,10645 22175,10645